# EAGLE board 16x16_3mm_3.2x3.2_shroud_header_charlieplexed_holes (EAGLE 6.0)
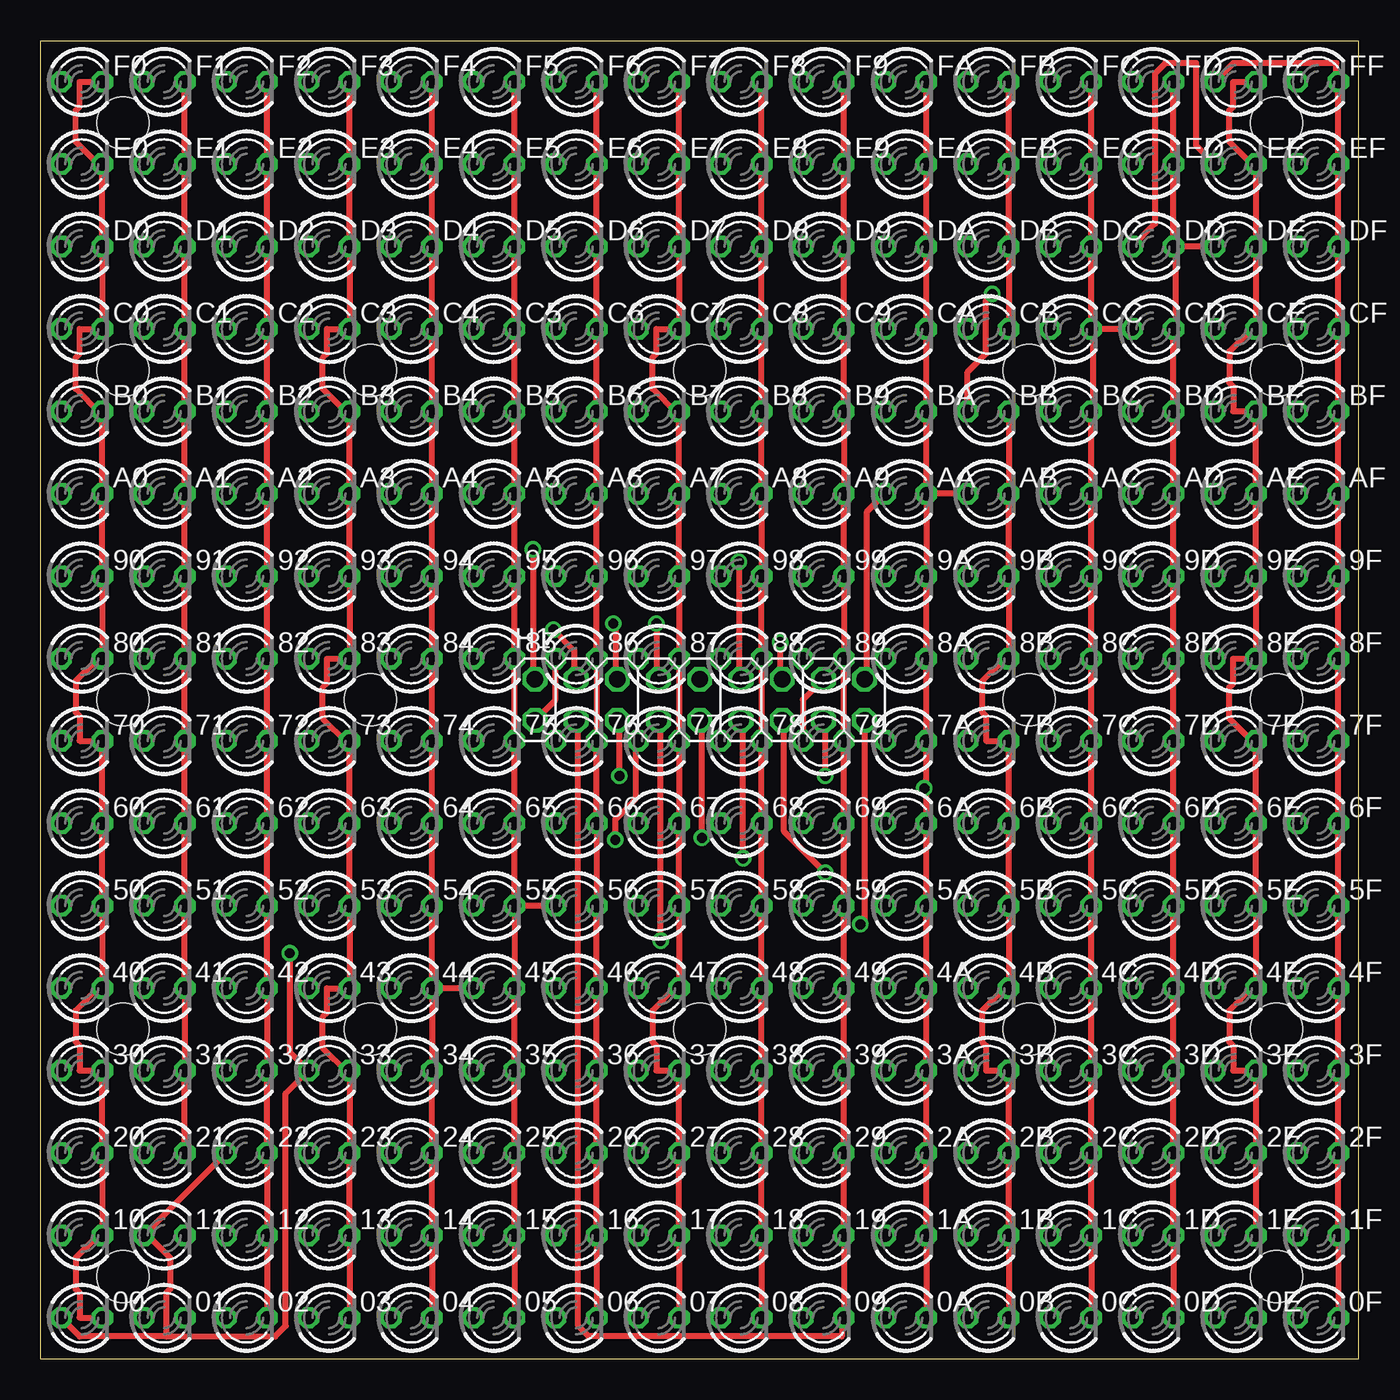
[diagram p0: board, top side]
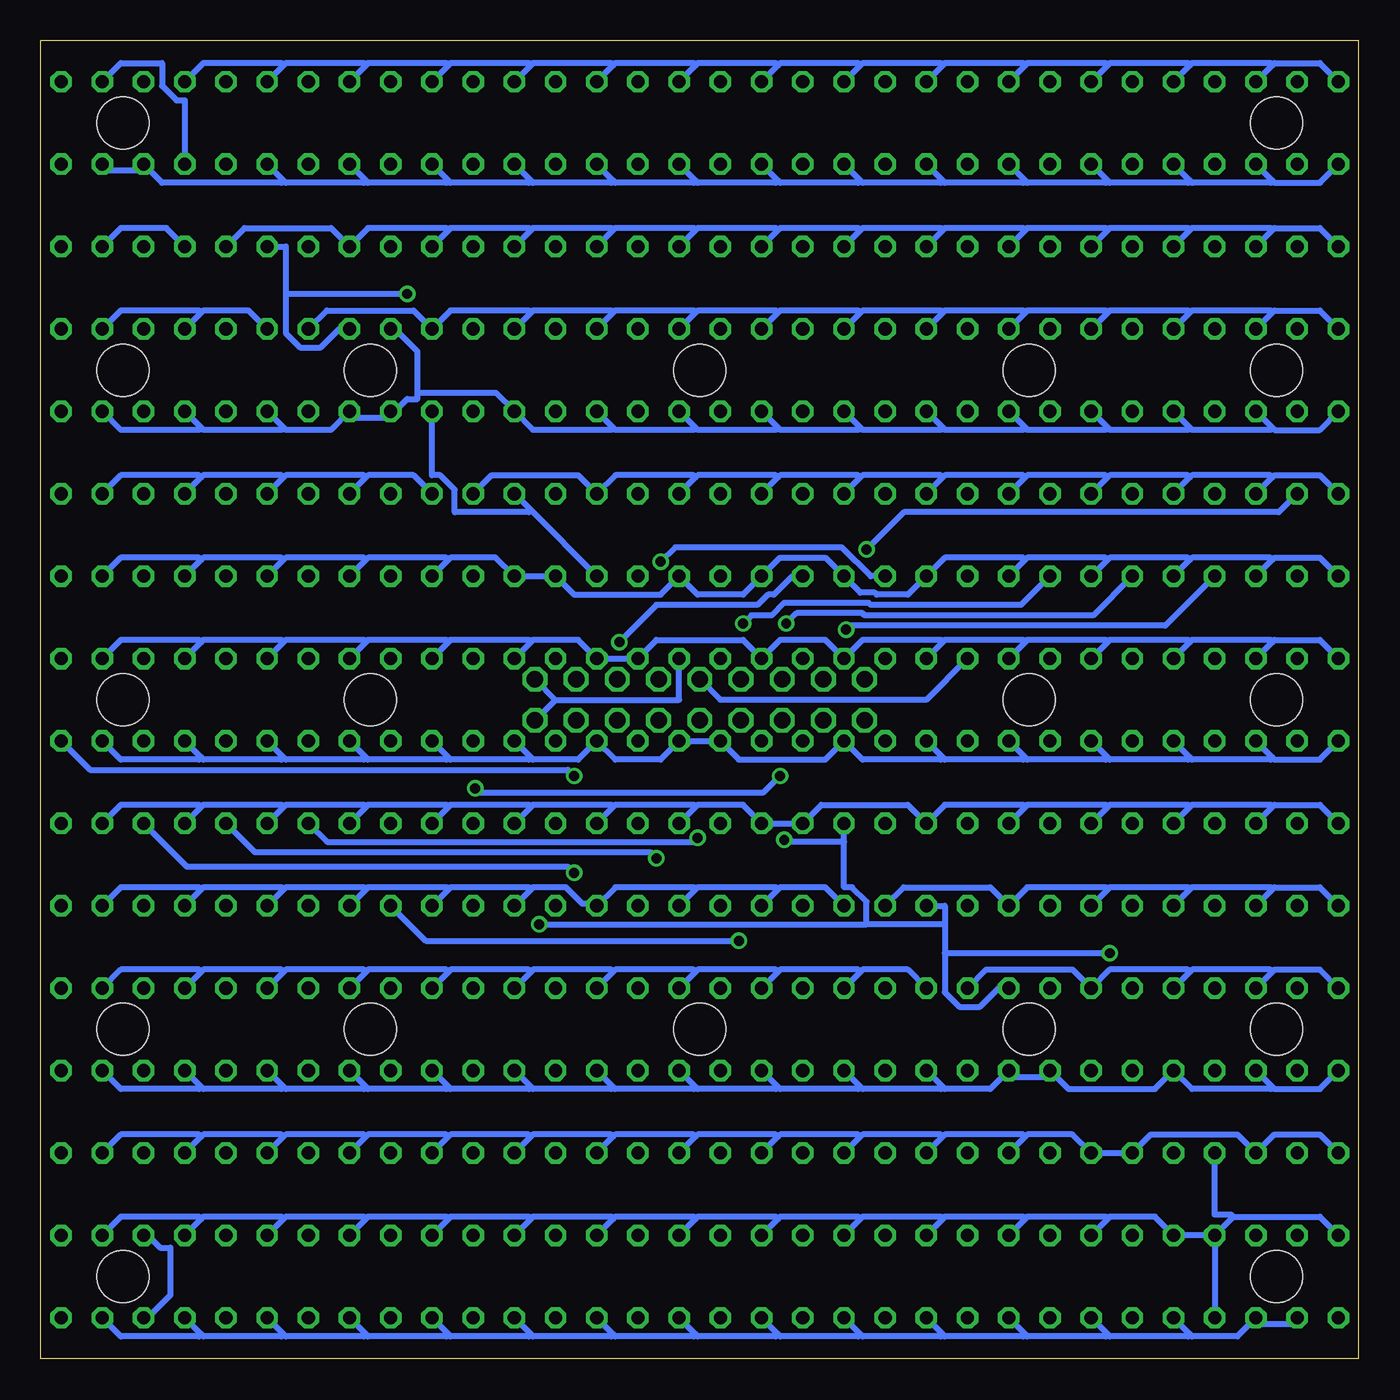
[diagram p1: board, bottom side, seen from below]

Size 81.28 x 81.28 mm. Coordinates in mm from the lower left corner, seen from the top.
Outline: 0,0 0,81.28 81.28,81.28 81.28,0 0,0
Copper layers (1*16): Top 0.035mm / dielectric 1.5mm / Bottom 0.035mm
Design rules: minimum track width 15mil, minimum drill 24mil, track to track 10mil, track to pad 10mil, pad to pad 8mil, via to via 8mil, smd to smd 8mil, copper to edge 40mil, drill to drill 8mil, minimum pad ring 10mil, minimum via ring 8mil, stop-mask expansion 4mil, vias tented up to drill 0mil, thermal gap 10mil
Holes 3.2 mm at 5.08,76.2 76.2,76.2 76.2,5.08 5.08,5.08 5.08,40.64 76.2,40.64 20.32,40.64 60.96,40.64 20.32,60.96 40.64,60.96 60.96,60.96 60.96,20.32 40.64,20.32 20.32,20.32 5.08,20.32 76.2,20.32 5.08,60.96 76.2,60.96

## Footprints (pad centres in the part's own frame; a part is rotated, then mirrored left to right if it is on the bottom)
LED3MM = drill 0.813 octagon: A -1.27,0; K 1.27,0
2X09 = drill 1.016 octagon: 1 -10.16,-1.27; 2 -10.16,1.27; 3 -7.62,-1.27; 4 -7.62,1.27; 5 -5.08,-1.27; 6 -5.08,1.27; 7 -2.54,-1.27; 8 -2.54,1.27; 9 0,-1.27; 10 0,1.27; 11 2.54,-1.27; 12 2.54,1.27; 13 5.08,-1.27; 14 5.08,1.27; 15 7.62,-1.27; 16 7.62,1.27; 17 10.16,-1.27; 18 10.16,1.27

## Placement (x,y rotation side)
00  [LED3MM]  2.54,2.54 0 top
0A  [LED3MM]  53.34,2.54 0 top
0B  [LED3MM]  58.42,2.54 0 top
0C  [LED3MM]  63.5,2.54 0 top
0D  [LED3MM]  68.58,2.54 0 top
0E  [LED3MM]  73.66,2.54 0 top
0F  [LED3MM]  78.74,2.54 0 top
01  [LED3MM]  7.62,2.54 0 top
1A  [LED3MM]  53.34,7.62 0 top
1B  [LED3MM]  58.42,7.62 0 top
1C  [LED3MM]  63.5,7.62 0 top
1D  [LED3MM]  68.58,7.62 0 top
1E  [LED3MM]  73.66,7.62 0 top
1F  [LED3MM]  78.74,7.62 0 top
02  [LED3MM]  12.7,2.54 0 top
2A  [LED3MM]  53.34,12.7 0 top
2B  [LED3MM]  58.42,12.7 0 top
2C  [LED3MM]  63.5,12.7 0 top
2D  [LED3MM]  68.58,12.7 0 top
2E  [LED3MM]  73.66,12.7 0 top
2F  [LED3MM]  78.74,12.7 0 top
03  [LED3MM]  17.78,2.54 0 top
3A  [LED3MM]  53.34,17.78 0 top
3B  [LED3MM]  58.42,17.78 0 top
3C  [LED3MM]  63.5,17.78 0 top
3D  [LED3MM]  68.58,17.78 0 top
3E  [LED3MM]  73.66,17.78 0 top
3F  [LED3MM]  78.74,17.78 0 top
04  [LED3MM]  22.86,2.54 0 top
4A  [LED3MM]  53.34,22.86 0 top
4B  [LED3MM]  58.42,22.86 0 top
4C  [LED3MM]  63.5,22.86 0 top
4D  [LED3MM]  68.58,22.86 0 top
4E  [LED3MM]  73.66,22.86 0 top
4F  [LED3MM]  78.74,22.86 0 top
05  [LED3MM]  27.94,2.54 0 top
5A  [LED3MM]  53.34,27.94 0 top
5B  [LED3MM]  58.42,27.94 0 top
5C  [LED3MM]  63.5,27.94 0 top
5D  [LED3MM]  68.58,27.94 0 top
5E  [LED3MM]  73.66,27.94 0 top
5F  [LED3MM]  78.74,27.94 0 top
06  [LED3MM]  33.02,2.54 0 top
6A  [LED3MM]  53.34,33.02 0 top
6B  [LED3MM]  58.42,33.02 0 top
6C  [LED3MM]  63.5,33.02 0 top
6D  [LED3MM]  68.58,33.02 0 top
6E  [LED3MM]  73.66,33.02 0 top
6F  [LED3MM]  78.74,33.02 0 top
07  [LED3MM]  38.1,2.54 0 top
7A  [LED3MM]  53.34,38.1 0 top
7B  [LED3MM]  58.42,38.1 0 top
7C  [LED3MM]  63.5,38.1 0 top
7D  [LED3MM]  68.58,38.1 0 top
7E  [LED3MM]  73.66,38.1 0 top
7F  [LED3MM]  78.74,38.1 0 top
08  [LED3MM]  43.18,2.54 0 top
8A  [LED3MM]  53.34,43.18 0 top
8B  [LED3MM]  58.42,43.18 0 top
8C  [LED3MM]  63.5,43.18 0 top
8D  [LED3MM]  68.58,43.18 0 top
8E  [LED3MM]  73.66,43.18 0 top
8F  [LED3MM]  78.74,43.18 0 top
09  [LED3MM]  48.26,2.54 0 top
9A  [LED3MM]  53.34,48.26 0 top
9B  [LED3MM]  58.42,48.26 0 top
9C  [LED3MM]  63.5,48.26 0 top
9D  [LED3MM]  68.58,48.26 0 top
9E  [LED3MM]  73.66,48.26 0 top
9F  [LED3MM]  78.74,48.26 0 top
10  [LED3MM]  2.54,7.62 0 top
11  [LED3MM]  7.62,7.62 0 top
12  [LED3MM]  12.7,7.62 0 top
13  [LED3MM]  17.78,7.62 0 top
14  [LED3MM]  22.86,7.62 0 top
15  [LED3MM]  27.94,7.62 0 top
16  [LED3MM]  33.02,7.62 0 top
17  [LED3MM]  38.1,7.62 0 top
18  [LED3MM]  43.18,7.62 0 top
19  [LED3MM]  48.26,7.62 0 top
20  [LED3MM]  2.54,12.7 0 top
21  [LED3MM]  7.62,12.7 0 top
22  [LED3MM]  12.7,12.7 0 top
23  [LED3MM]  17.78,12.7 0 top
24  [LED3MM]  22.86,12.7 0 top
25  [LED3MM]  27.94,12.7 0 top
26  [LED3MM]  33.02,12.7 0 top
27  [LED3MM]  38.1,12.7 0 top
28  [LED3MM]  43.18,12.7 0 top
29  [LED3MM]  48.26,12.7 0 top
30  [LED3MM]  2.54,17.78 0 top
31  [LED3MM]  7.62,17.78 0 top
32  [LED3MM]  12.7,17.78 0 top
33  [LED3MM]  17.78,17.78 0 top
34  [LED3MM]  22.86,17.78 0 top
35  [LED3MM]  27.94,17.78 0 top
36  [LED3MM]  33.02,17.78 0 top
37  [LED3MM]  38.1,17.78 0 top
38  [LED3MM]  43.18,17.78 0 top
39  [LED3MM]  48.26,17.78 0 top
40  [LED3MM]  2.54,22.86 0 top
41  [LED3MM]  7.62,22.86 0 top
42  [LED3MM]  12.7,22.86 0 top
43  [LED3MM]  17.78,22.86 0 top
44  [LED3MM]  22.86,22.86 0 top
45  [LED3MM]  27.94,22.86 0 top
46  [LED3MM]  33.02,22.86 0 top
47  [LED3MM]  38.1,22.86 0 top
48  [LED3MM]  43.18,22.86 0 top
49  [LED3MM]  48.26,22.86 0 top
50  [LED3MM]  2.54,27.94 0 top
51  [LED3MM]  7.62,27.94 0 top
52  [LED3MM]  12.7,27.94 0 top
53  [LED3MM]  17.78,27.94 0 top
54  [LED3MM]  22.86,27.94 0 top
55  [LED3MM]  27.94,27.94 0 top
56  [LED3MM]  33.02,27.94 0 top
57  [LED3MM]  38.1,27.94 0 top
58  [LED3MM]  43.18,27.94 0 top
59  [LED3MM]  48.26,27.94 0 top
60  [LED3MM]  2.54,33.02 0 top
61  [LED3MM]  7.62,33.02 0 top
62  [LED3MM]  12.7,33.02 0 top
63  [LED3MM]  17.78,33.02 0 top
64  [LED3MM]  22.86,33.02 0 top
65  [LED3MM]  27.94,33.02 0 top
66  [LED3MM]  33.02,33.02 0 top
67  [LED3MM]  38.1,33.02 0 top
68  [LED3MM]  43.18,33.02 0 top
69  [LED3MM]  48.26,33.02 0 top
70  [LED3MM]  2.54,38.1 0 top
71  [LED3MM]  7.62,38.1 0 top
72  [LED3MM]  12.7,38.1 0 top
73  [LED3MM]  17.78,38.1 0 top
74  [LED3MM]  22.86,38.1 0 top
75  [LED3MM]  27.94,38.1 0 top
76  [LED3MM]  33.02,38.1 0 top
77  [LED3MM]  38.1,38.1 0 top
78  [LED3MM]  43.18,38.1 0 top
79  [LED3MM]  48.26,38.1 0 top
80  [LED3MM]  2.54,43.18 0 top
81  [LED3MM]  7.62,43.18 0 top
82  [LED3MM]  12.7,43.18 0 top
83  [LED3MM]  17.78,43.18 0 top
84  [LED3MM]  22.86,43.18 0 top
85  [LED3MM]  27.94,43.18 0 top
86  [LED3MM]  33.02,43.18 0 top
87  [LED3MM]  38.1,43.18 0 top
88  [LED3MM]  43.18,43.18 0 top
89  [LED3MM]  48.26,43.18 0 top
90  [LED3MM]  2.54,48.26 0 top
91  [LED3MM]  7.62,48.26 0 top
92  [LED3MM]  12.7,48.26 0 top
93  [LED3MM]  17.78,48.26 0 top
94  [LED3MM]  22.86,48.26 0 top
95  [LED3MM]  27.94,48.26 0 top
96  [LED3MM]  33.02,48.26 0 top
97  [LED3MM]  38.1,48.26 0 top
98  [LED3MM]  43.18,48.26 0 top
99  [LED3MM]  48.26,48.26 0 top
A0  [LED3MM]  2.54,53.34 0 top
A1  [LED3MM]  7.62,53.34 0 top
A2  [LED3MM]  12.7,53.34 0 top
A3  [LED3MM]  17.78,53.34 0 top
A4  [LED3MM]  22.86,53.34 0 top
A5  [LED3MM]  27.94,53.34 0 top
A6  [LED3MM]  33.02,53.34 0 top
A7  [LED3MM]  38.1,53.34 0 top
A8  [LED3MM]  43.18,53.34 0 top
A9  [LED3MM]  48.26,53.34 0 top
AA  [LED3MM]  53.34,53.34 0 top
AB  [LED3MM]  58.42,53.34 0 top
AC  [LED3MM]  63.5,53.34 0 top
AD  [LED3MM]  68.58,53.34 0 top
AE  [LED3MM]  73.66,53.34 0 top
AF  [LED3MM]  78.74,53.34 0 top
B0  [LED3MM]  2.54,58.42 0 top
B1  [LED3MM]  7.62,58.42 0 top
B2  [LED3MM]  12.7,58.42 0 top
B3  [LED3MM]  17.78,58.42 0 top
B4  [LED3MM]  22.86,58.42 0 top
B5  [LED3MM]  27.94,58.42 0 top
B6  [LED3MM]  33.02,58.42 0 top
B7  [LED3MM]  38.1,58.42 0 top
B8  [LED3MM]  43.18,58.42 0 top
B9  [LED3MM]  48.26,58.42 0 top
BA  [LED3MM]  53.34,58.42 0 top
BB  [LED3MM]  58.42,58.42 0 top
BC  [LED3MM]  63.5,58.42 0 top
BD  [LED3MM]  68.58,58.42 0 top
BE  [LED3MM]  73.66,58.42 0 top
BF  [LED3MM]  78.74,58.42 0 top
C0  [LED3MM]  2.54,63.5 0 top
C1  [LED3MM]  7.62,63.5 0 top
C2  [LED3MM]  12.7,63.5 0 top
C3  [LED3MM]  17.78,63.5 0 top
C4  [LED3MM]  22.86,63.5 0 top
C5  [LED3MM]  27.94,63.5 0 top
C6  [LED3MM]  33.02,63.5 0 top
C7  [LED3MM]  38.1,63.5 0 top
C8  [LED3MM]  43.18,63.5 0 top
C9  [LED3MM]  48.26,63.5 0 top
CA  [LED3MM]  53.34,63.5 0 top
CB  [LED3MM]  58.42,63.5 0 top
CC  [LED3MM]  63.5,63.5 0 top
CD  [LED3MM]  68.58,63.5 0 top
CE  [LED3MM]  73.66,63.5 0 top
CF  [LED3MM]  78.74,63.5 0 top
D0  [LED3MM]  2.54,68.58 0 top
D1  [LED3MM]  7.62,68.58 0 top
D2  [LED3MM]  12.7,68.58 0 top
D3  [LED3MM]  17.78,68.58 0 top
D4  [LED3MM]  22.86,68.58 0 top
D5  [LED3MM]  27.94,68.58 0 top
D6  [LED3MM]  33.02,68.58 0 top
D7  [LED3MM]  38.1,68.58 0 top
D8  [LED3MM]  43.18,68.58 0 top
D9  [LED3MM]  48.26,68.58 0 top
DA  [LED3MM]  53.34,68.58 0 top
DB  [LED3MM]  58.42,68.58 0 top
DC  [LED3MM]  63.5,68.58 0 top
DD  [LED3MM]  68.58,68.58 0 top
DE  [LED3MM]  73.66,68.58 0 top
DF  [LED3MM]  78.74,68.58 0 top
E0  [LED3MM]  2.54,73.66 0 top
E1  [LED3MM]  7.62,73.66 0 top
E2  [LED3MM]  12.7,73.66 0 top
E3  [LED3MM]  17.78,73.66 0 top
E4  [LED3MM]  22.86,73.66 0 top
E5  [LED3MM]  27.94,73.66 0 top
E6  [LED3MM]  33.02,73.66 0 top
E7  [LED3MM]  38.1,73.66 0 top
E8  [LED3MM]  43.18,73.66 0 top
E9  [LED3MM]  48.26,73.66 0 top
EA  [LED3MM]  53.34,73.66 0 top
EB  [LED3MM]  58.42,73.66 0 top
EC  [LED3MM]  63.5,73.66 0 top
ED  [LED3MM]  68.58,73.66 0 top
EE  [LED3MM]  73.66,73.66 0 top
EF  [LED3MM]  78.74,73.66 0 top
F0  [LED3MM]  2.54,78.74 0 top
F1  [LED3MM]  7.62,78.74 0 top
F2  [LED3MM]  12.7,78.74 0 top
F3  [LED3MM]  17.78,78.74 0 top
F4  [LED3MM]  22.86,78.74 0 top
F5  [LED3MM]  27.94,78.74 0 top
F6  [LED3MM]  33.02,78.74 0 top
F7  [LED3MM]  38.1,78.74 0 top
F8  [LED3MM]  43.18,78.74 0 top
F9  [LED3MM]  48.26,78.74 0 top
FA  [LED3MM]  53.34,78.74 0 top
FB  [LED3MM]  58.42,78.74 0 top
FC  [LED3MM]  63.5,78.74 0 top
FD  [LED3MM]  68.58,78.74 0 top
FE  [LED3MM]  73.66,78.74 0 top
FF  [LED3MM]  78.74,78.74 0 top
H1  [2X09]  40.64,40.64 0 top

## Library data of the parts
00 0A 0B 0C 0D 0E 0F 01 1A 1B 1C 1D 1E 1F 02 2A 2B 2C 2D 2E 2F 03 3A 3B 3C 3D 3E 3F 04 4A 4B 4C 4D 4E 4F 05 5A 5B 5C 5D 5E 5F 06 6A 6B 6C 6D 6E 6F 07 7A 7B 7C 7D 7E 7F 08 8A 8B 8C 8D 8E 8F 09 9A 9B 9C 9D 9E 9F 10-99 A0 A1-A9 AA AB AC AD AE AF B0 B1-B9 BA BB BC BD BE BF C0 C1-C9 CA CB CC CD CE CF D0 D1-D9 DA DB DC DD DE DF E0 E1-E9 EA EB EC ED EE EF F0 F1-F9 FA FB FC FD FE FF = led
H1 = pinhead

## Nets
D: 00.A 11.A 22.A 33.A 44.A 55.A 66.A 77.A 88.A 99.A AA.A BB.A CC.A DD.A EE.A FF.A H1.17 H1.18
S0: 00.K 0A.A 0B.A 0C.A 0D.A 0E.A 0F.A 01.A 02.A 03.A 04.A 05.A 06.A 07.A 08.A 09.A 10.K 20.K 30.K 40.K 50.K 60.K 70.K 80.K 90.K A0.K B0.K C0.K D0.K E0.K F0.K H1.2
S1: 01.K 1A.A 1B.A 1C.A 1D.A 1E.A 1F.A 10.A 11.K 12.A 13.A 14.A 15.A 16.A 17.A 18.A 19.A 21.K 31.K 41.K 51.K 61.K 71.K 81.K 91.K A1.K B1.K C1.K D1.K E1.K F1.K H1.4
S2: 02.K 2A.A 2B.A 2C.A 2D.A 2E.A 2F.A 12.K 20.A 21.A 22.K 23.A 24.A 25.A 26.A 27.A 28.A 29.A 32.K 42.K 52.K 62.K 72.K 82.K 92.K A2.K B2.K C2.K D2.K E2.K F2.K H1.6
S3: 03.K 3A.A 3B.A 3C.A 3D.A 3E.A 3F.A 13.K 23.K 30.A 31.A 32.A 33.K 34.A 35.A 36.A 37.A 38.A 39.A 43.K 53.K 63.K 73.K 83.K 93.K A3.K B3.K C3.K D3.K E3.K F3.K H1.8
S4: 04.K 4A.A 4B.A 4C.A 4D.A 4E.A 4F.A 14.K 24.K 34.K 40.A 41.A 42.A 43.A 44.K 45.A 46.A 47.A 48.A 49.A 54.K 64.K 74.K 84.K 94.K A4.K B4.K C4.K D4.K E4.K F4.K H1.10
S5: 05.K 5A.A 5B.A 5C.A 5D.A 5E.A 5F.A 15.K 25.K 35.K 45.K 50.A 51.A 52.A 53.A 54.A 55.K 56.A 57.A 58.A 59.A 65.K 75.K 85.K 95.K A5.K B5.K C5.K D5.K E5.K F5.K H1.12
S6: 06.K 6A.A 6B.A 6C.A 6D.A 6E.A 6F.A 16.K 26.K 36.K 46.K 56.K 60.A 61.A 62.A 63.A 64.A 65.A 66.K 67.A 68.A 69.A 76.K 86.K 96.K A6.K B6.K C6.K D6.K E6.K F6.K H1.14
S7: 07.K 7A.A 7B.A 7C.A 7D.A 7E.A 7F.A 17.K 27.K 37.K 47.K 57.K 67.K 70.A 71.A 72.A 73.A 74.A 75.A 76.A 77.K 78.A 79.A 87.K 97.K A7.K B7.K C7.K D7.K E7.K F7.K H1.16
S8: 08.K 8A.A 8B.A 8C.A 8D.A 8E.A 8F.A 18.K 28.K 38.K 48.K 58.K 68.K 78.K 80.A 81.A 82.A 83.A 84.A 85.A 86.A 87.A 88.K 89.A 98.K A8.K B8.K C8.K D8.K E8.K F8.K H1.1
S9: 09.K 9A.A 9B.A 9C.A 9D.A 9E.A 9F.A 19.K 29.K 39.K 49.K 59.K 69.K 79.K 89.K 90.A 91.A 92.A 93.A 94.A 95.A 96.A 97.A 98.A 99.K A9.K B9.K C9.K D9.K E9.K F9.K H1.3
S10: 0A.K 1A.K 2A.K 3A.K 4A.K 5A.K 6A.K 7A.K 8A.K 9A.K A0.A A1.A A2.A A3.A A4.A A5.A A6.A A7.A A8.A A9.A AA.K AB.A AC.A AD.A AE.A AF.A BA.K CA.K DA.K EA.K FA.K H1.5
S11: 0B.K 1B.K 2B.K 3B.K 4B.K 5B.K 6B.K 7B.K 8B.K 9B.K AB.K B0.A B1.A B2.A B3.A B4.A B5.A B6.A B7.A B8.A B9.A BA.A BB.K BC.A BD.A BE.A BF.A CB.K DB.K EB.K FB.K H1.7
S12: 0C.K 1C.K 2C.K 3C.K 4C.K 5C.K 6C.K 7C.K 8C.K 9C.K AC.K BC.K C0.A C1.A C2.A C3.A C4.A C5.A C6.A C7.A C8.A C9.A CA.A CB.A CC.K CD.A CE.A CF.A DC.K EC.K FC.K H1.9
S13: 0D.K 1D.K 2D.K 3D.K 4D.K 5D.K 6D.K 7D.K 8D.K 9D.K AD.K BD.K CD.K D0.A D1.A D2.A D3.A D4.A D5.A D6.A D7.A D8.A D9.A DA.A DB.A DC.A DD.K DE.A DF.A ED.K FD.K H1.11
S14: 0E.K 1E.K 2E.K 3E.K 4E.K 5E.K 6E.K 7E.K 8E.K 9E.K AE.K BE.K CE.K DE.K E0.A E1.A E2.A E3.A E4.A E5.A E6.A E7.A E8.A E9.A EA.A EB.A EC.A ED.A EE.K EF.A FE.K H1.13
S15: 0F.K 1F.K 2F.K 3F.K 4F.K 5F.K 6F.K 7F.K 8F.K 9F.K AF.K BF.K CF.K DF.K EF.K F0.A F1.A F2.A F3.A F4.A F5.A F6.A F7.A F8.A F9.A FA.A FB.A FC.A FD.A FE.A FF.K H1.15

## Tracks (layer width: path | path; a pad name or v marks a point on that pad's centre or on a via)
D  (via drill 0.61)
  Top 0.381: 00.A 2.41,1.4 7.75,1.4 | 7.75,1.4 7.75,4.06 8,4.32 8,6.22 6.6,7.62 11.A 6.73,7.75 6.73,8 22.A | 7.75,1.4 14.48,1.4 15.11,2.03 15.11,16.38 33.A 15.37,18.92 v15.37,25.02 | 77.A 36.7,37.97 36.7,34.54 35.43,33.27 v35.43,32 | DD.A 68.71,69.98 68.71,79.25 69.34,79.88 71.25,79.88 71.25,74.8 EE.A | H1.18 50.93,42.04 50.93,52.2 AA.A | v58.67,65.66 58.29,65.28 58.29,61.98 57.15,60.83 BB.A | v50.55,26.8 50.8,27.05 H1.17
  Bottom 0.381: 44.A 22.23,22.86 23.37,21.72 24.64,21.72 25.53,22.61 25.53,25.02 | 25.53,26.8 25.53,27.94 55.A | 25.53,26.8 25.53,25.02 | 31.75,31.88 31.75,29.08 31.24,29.08 30.35,28.19 30.35,26.8 | 31.75,31.88 66.A | 25.53,26.8 30.35,26.8 | v35.43,32 35.31,31.88 31.75,31.88 | 25.53,25.02 v15.37,25.02 | CC.A 62.87,63.5 64.01,62.36 65.28,62.36 66.17,63.25 66.17,65.66 | 66.17,65.66 66.17,68.58 DD.A | EE.A 72.39,77.6 72.9,77.6 73.79,78.49 73.79,79.88 76.33,79.88 FF.A | 88.A 41.91,40.64 49.53,40.64 | H1.18 49.53,40.64 | 49.53,40.64 H1.17 | AA.A 51.05,52.32 | 51.05,52.32 99.A | BB.A 57.15,54.48 56.64,54.48 55.75,53.59 55.75,52.2 51.18,52.2 51.05,52.32 | v58.67,65.66 66.17,65.66 | v50.55,26.8 30.35,26.8
S0  (via drill 0.61)
  Top 0.381: F0.K 2.41,78.74 2.41,77.22 2.16,76.96 2.16,75.06 3.68,73.53 E0.K D0.K C0.K 2.41,63.5 2.41,61.98 2.16,61.72 2.16,59.82 3.68,58.29 B0.K A0.K 90.K 80.K 3.68,43.31 2.16,41.78 2.16,39.88 2.41,39.62 2.41,38.1 70.K 60.K 50.K 40.K 3.68,22.99 2.16,21.46 2.16,19.56 2.41,19.3 2.41,17.78 30.K 20.K 10.K 3.68,7.75 2.16,6.22 2.16,4.32 2.41,4.06 2.41,2.54 00.K | H1.2 30.35,42.04 v30.35,49.91
  Bottom 0.381: 00.K 4.19,2.16 5.97,2.16 01.A 7.49,1.4 10.29,1.4 10.41,1.52 | 10.41,1.52 02.A | 15.49,1.52 15.37,1.4 10.54,1.4 10.41,1.52 | 15.49,1.52 03.A | 20.57,1.52 20.45,1.4 15.62,1.4 15.49,1.52 | 20.57,1.52 04.A | 25.65,1.52 25.53,1.4 20.7,1.4 20.57,1.52 | 25.65,1.52 05.A | 30.73,1.52 30.61,1.4 25.78,1.4 25.65,1.52 | 30.73,1.52 06.A | 35.81,1.52 35.69,1.4 30.86,1.4 30.73,1.52 | 35.81,1.52 07.A | 40.89,1.52 40.77,1.4 35.94,1.4 35.81,1.52 | 40.89,1.52 08.A | 45.97,1.52 45.85,1.4 41.02,1.4 40.89,1.52 | 45.97,1.52 09.A | 51.05,1.52 50.93,1.4 46.1,1.4 45.97,1.52 | 51.05,1.52 0A.A | 56.13,1.52 56.01,1.4 51.18,1.4 51.05,1.52 | 56.13,1.52 0B.A | 61.21,1.52 61.09,1.4 56.26,1.4 56.13,1.52 | 61.21,1.52 0C.A | 66.29,1.52 66.17,1.4 61.34,1.4 61.21,1.52 | 66.29,1.52 0D.A | 71.37,1.52 71.25,1.4 66.42,1.4 66.29,1.52 | 71.37,1.52 0E.A | 0F.A 76.33,1.4 71.5,1.4 71.37,1.52 | v30.35,49.91 28.07,52.2 4.95,52.2 A0.K
S1  (via drill 0.61)
  Top 0.381: F1.K E1.K D1.K C1.K B1.K A1.K 91.K 81.K 71.K 61.K 51.K 41.K 31.K 21.K | H1.4 32.89,42.04 32.89,43.69 v31.62,44.96
  Bottom 0.381: v31.62,44.96 31.37,45.21 11.94,45.21 91.K | 10.A 2.41,8.76 7.75,8.76 | 11.K 7.75,8.76 | 11.K 01.K | 11.K 12.A 12.57,8.76 15.37,8.76 15.49,8.64 | 15.49,8.64 13.A | 20.57,8.64 20.45,8.76 15.62,8.76 15.49,8.64 | 20.57,8.64 14.A | 25.65,8.64 25.53,8.76 20.7,8.76 20.57,8.64 | 25.65,8.64 15.A | 30.73,8.64 30.61,8.76 25.78,8.76 25.65,8.64 | 30.73,8.64 16.A | 35.81,8.64 35.69,8.76 30.86,8.76 30.73,8.64 | 35.81,8.64 17.A | 40.89,8.64 40.77,8.76 35.94,8.76 35.81,8.64 | 40.89,8.64 18.A | 45.97,8.64 45.85,8.76 41.02,8.76 40.89,8.64 | 45.97,8.64 19.A | 51.05,8.64 50.93,8.76 46.1,8.76 45.97,8.64 | 51.05,8.64 1A.A | 56.13,8.64 56.01,8.76 51.18,8.76 51.05,8.64 | 56.13,8.64 1B.A | 61.21,8.64 61.09,8.76 56.26,8.76 56.13,8.64 | 61.21,8.64 1C.A | 66.29,8.64 66.17,8.76 61.34,8.76 61.21,8.64 | 66.29,8.64 1D.A | 71.37,8.64 71.25,8.76 66.42,8.76 66.29,8.64 | 71.37,8.64 1E.A | 1F.A 76.33,8.76 71.5,8.76 71.37,8.64 | 21.K 8.89,8.89 7.87,8.89 7.75,8.76
S2  (via drill 0.61)
  Top 0.381: F2.K E2.K D2.K C2.K B2.K A2.K 92.K 82.K 72.K 62.K 52.K 42.K 32.K 22.K 12.K 02.K | H1.6 35.43,42.04 35.43,45.21 v35.31,45.34
  Bottom 0.381: v35.31,45.34 34.67,45.97 30.61,45.97 30.48,45.85 16.38,45.85 92.K | 20.A 2.41,13.84 5.21,13.84 21.A 7.49,13.84 12.83,13.84 22.K 23.A 17.65,13.84 20.45,13.84 20.57,13.72 | 20.57,13.72 24.A | 25.65,13.72 25.53,13.84 20.7,13.84 20.57,13.72 | 25.65,13.72 25.A | 30.73,13.72 30.61,13.84 25.78,13.84 25.65,13.72 | 30.73,13.72 26.A | 35.81,13.72 35.69,13.84 30.86,13.84 30.73,13.72 | 35.81,13.72 27.A | 40.89,13.72 40.77,13.84 35.94,13.84 35.81,13.72 | 40.89,13.72 28.A | 45.97,13.72 45.85,13.84 41.02,13.84 40.89,13.72 | 45.97,13.72 29.A | 51.05,13.72 50.93,13.84 46.1,13.84 45.97,13.72 | 51.05,13.72 2A.A | 56.13,13.72 56.01,13.84 51.18,13.84 51.05,13.72 | 56.13,13.72 2B.A | 61.21,13.72 61.09,13.84 56.26,13.84 56.13,13.72 | 61.21,13.72 2C.A | 66.29,13.72 66.17,13.84 61.34,13.84 61.21,13.72 | 66.29,13.72 2D.A | 71.37,13.72 71.25,13.84 66.42,13.84 66.29,13.72 | 71.37,13.72 2E.A | 2F.A 76.33,13.84 71.5,13.84 71.37,13.72
S3  (via drill 0.61)
  Top 0.381: F3.K E3.K D3.K C3.K 17.65,63.5 17.65,61.98 17.4,61.72 17.4,59.82 18.92,58.29 B3.K A3.K 93.K 83.K 17.65,43.18 17.65,41.66 17.4,41.4 17.4,39.5 18.92,37.97 73.K 63.K 53.K 43.K 17.65,22.86 17.65,21.34 17.4,21.08 17.4,19.18 18.92,17.65 33.K 23.K 13.K 03.K | H1.8 37.97,42.04 v37.97,45.34
  Bottom 0.381: v37.97,45.34 37.47,45.85 36.2,45.85 35.43,46.61 30.23,46.61 30.1,46.48 20.83,46.48 93.K | 30.A 2.41,16.64 5.21,16.64 5.33,16.76 | 31.A 5.33,16.76 | 5.33,16.76 5.46,16.64 10.29,16.64 32.A 12.57,16.64 17.91,16.64 33.K 19.43,17.4 21.21,17.4 34.A 22.73,16.64 25.53,16.64 25.65,16.76 | 25.65,16.76 35.A | 30.73,16.76 30.61,16.64 25.78,16.64 25.65,16.76 | 30.73,16.76 36.A | 35.81,16.76 35.69,16.64 30.86,16.64 30.73,16.76 | 35.81,16.76 37.A | 40.89,16.76 40.77,16.64 35.94,16.64 35.81,16.76 | 40.89,16.76 38.A | 45.97,16.76 45.85,16.64 41.02,16.64 40.89,16.76 | 45.97,16.76 39.A | 51.05,16.76 50.93,16.64 46.1,16.64 45.97,16.76 | 51.05,16.76 3A.A | 56.13,16.76 56.01,16.64 51.18,16.64 51.05,16.76 | 56.13,16.76 3B.A | 61.21,16.76 61.09,16.64 56.26,16.64 56.13,16.76 | 61.21,16.76 3C.A | 66.29,16.76 66.17,16.64 61.34,16.64 61.21,16.76 | 66.29,16.76 3D.A | 71.37,16.76 71.25,16.64 66.42,16.64 66.29,16.76 | 71.37,16.76 3E.A | 3F.A 76.33,16.64 71.5,16.64 71.37,16.76
S4
  Top 0.381: 04.K 14.K 24.K 34.K 44.K | 45.A 44.K | 44.K 54.K 64.K 74.K 84.K 94.K A4.K B4.K C4.K D4.K E4.K F4.K
  Bottom 0.381: 40.A 2.41,24 5.21,24 5.33,23.88 | 41.A 5.33,23.88 | 10.41,23.88 10.29,24 5.46,24 5.33,23.88 | 10.41,23.88 42.A | 10.41,23.88 10.54,24 15.37,24 43.A 17.65,24 22.99,24 44.K | 30.73,23.88 30.61,24 27.81,24 45.A | 30.73,23.88 46.A | 35.81,23.88 35.69,24 30.86,24 30.73,23.88 | 35.81,23.88 47.A | 40.89,23.88 40.77,24 35.94,24 35.81,23.88 | 40.89,23.88 48.A | 45.97,23.88 45.85,24 41.02,24 40.89,23.88 | 45.97,23.88 49.A | 51.05,23.88 50.93,24 46.1,24 45.97,23.88 | 51.05,23.88 4A.A | 56.13,23.88 56.01,24 51.18,24 51.05,23.88 | 56.13,23.88 4B.A | 61.21,23.88 61.09,24 56.26,24 56.13,23.88 | 61.21,23.88 4C.A | 66.29,23.88 66.17,24 61.34,24 61.21,23.88 | 66.29,23.88 4D.A | 71.37,23.88 71.25,24 66.42,24 66.29,23.88 | 71.37,23.88 4E.A | 4F.A 76.33,24 71.5,24 71.37,23.88 | H1.10 39.37,40.64 26.67,40.64 84.K
S5  (via drill 0.61)
  Top 0.381: 05.K 15.K 25.K 35.K 45.K 55.K | 56.A 55.K | 55.K 65.K 75.K 85.K 95.K A5.K B5.K C5.K D5.K E5.K F5.K | H1.12 43.05,42.04 v43.05,49.15
  Bottom 0.381: 50.A 2.41,29.08 5.21,29.08 5.33,28.96 | 51.A 5.33,28.96 | 10.41,28.96 10.29,29.08 5.46,29.08 5.33,28.96 | 10.41,28.96 52.A | 15.49,28.96 15.37,29.08 10.54,29.08 10.41,28.96 | 15.49,28.96 53.A | 15.49,28.96 15.62,29.08 20.45,29.08 54.A 22.73,29.08 28.07,29.08 55.K | 35.81,28.96 35.69,29.08 32.89,29.08 56.A | 35.81,28.96 57.A | 40.89,28.96 40.77,29.08 35.94,29.08 35.81,28.96 | 40.89,28.96 58.A | 40.89,28.96 41.02,29.08 45.85,29.08 59.A 47.12,28.07 47.88,28.07 48.9,29.08 50.93,29.08 51.05,28.96 | 51.05,28.96 5A.A | 56.13,28.96 56.01,29.08 51.18,29.08 51.05,28.96 | 56.13,28.96 5B.A | 61.21,28.96 61.09,29.08 56.26,29.08 56.13,28.96 | 61.21,28.96 5C.A | 66.29,28.96 66.17,29.08 61.34,29.08 61.21,28.96 | 66.29,28.96 5D.A | 71.37,28.96 71.25,29.08 66.42,29.08 66.29,28.96 | 71.37,28.96 5E.A | 5F.A 76.33,29.08 71.5,29.08 71.37,28.96 | v43.05,49.15 42.16,50.04 31.88,50.04 30.1,48.26 95.K
S6  (via drill 0.61)
  Top 0.381: F6.K E6.K D6.K C6.K B6.K A6.K 96.K 86.K 76.K 66.K 56.K 46.K 36.K 26.K 16.K 06.K | H1.14 45.59,42.04 v45.59,44.2
  Bottom 0.381: v45.59,44.2 43.31,46.48 37.08,46.48 36.45,47.12 36.07,47.12 34.92,48.26 96.K | 60.A 2.41,34.16 5.21,34.16 5.33,34.04 | 61.A 5.33,34.04 | 10.41,34.04 10.29,34.16 5.46,34.16 5.33,34.04 | 10.41,34.04 62.A | 15.49,34.04 15.37,34.16 10.54,34.16 10.41,34.04 | 15.49,34.04 63.A | 20.57,34.04 20.45,34.16 15.62,34.16 15.49,34.04 | 20.57,34.04 64.A | 20.57,34.04 20.7,34.16 25.53,34.16 65.A 27.81,34.16 33.15,34.16 66.K 67.A 37.97,34.16 40.77,34.16 40.89,34.04 | 40.89,34.04 68.A | 45.97,34.04 45.85,34.16 41.02,34.16 40.89,34.04 | 45.97,34.04 69.A | 51.05,34.04 50.93,34.16 46.1,34.16 45.97,34.04 | 51.05,34.04 6A.A | 56.13,34.04 56.01,34.16 51.18,34.16 51.05,34.04 | 56.13,34.04 6B.A | 61.21,34.04 61.09,34.16 56.26,34.16 56.13,34.04 | 61.21,34.04 6C.A | 66.29,34.04 66.17,34.16 61.34,34.16 61.21,34.04 | 66.29,34.04 6D.A | 71.37,34.04 71.25,34.16 66.42,34.16 66.29,34.04 | 71.37,34.04 6E.A | 6F.A 76.33,34.16 71.5,34.16 71.37,34.04
S7
  Top 0.381: 79.A 46.99,40.64 H1.16 | F7.K E7.K D7.K C7.K 37.97,63.5 37.97,61.98 37.72,61.72 37.72,59.82 39.24,58.29 B7.K A7.K 97.K 87.K 77.K 67.K 57.K 47.K 39.24,22.99 37.72,21.46 37.72,19.56 37.97,19.3 37.97,17.78 37.K 27.K 17.K 07.K
  Bottom 0.381: 51.05,37.08 50.93,36.96 48.13,36.96 79.A 45.85,36.96 43.05,36.96 78.A 77.K 38.23,36.96 32.89,36.96 76.A 30.61,36.96 25.78,36.96 25.65,37.08 | 51.05,37.08 7A.A | 56.13,37.08 56.01,36.96 51.18,36.96 51.05,37.08 | 56.13,37.08 7B.A | 61.21,37.08 61.09,36.96 56.26,36.96 56.13,37.08 | 61.21,37.08 7C.A | 66.29,37.08 66.17,36.96 61.34,36.96 61.21,37.08 | 66.29,37.08 7D.A | 71.37,37.08 71.25,36.96 66.42,36.96 66.29,37.08 | 71.37,37.08 7E.A | 7F.A 76.33,36.96 71.5,36.96 71.37,37.08 | 70.A 2.41,36.96 5.21,36.96 5.33,37.08 | 71.A 5.33,37.08 | 10.41,37.08 10.29,36.96 5.46,36.96 5.33,37.08 | 10.41,37.08 72.A | 15.49,37.08 15.37,36.96 10.54,36.96 10.41,37.08 | 15.49,37.08 73.A | 20.57,37.08 20.45,36.96 15.62,36.96 15.49,37.08 | 20.57,37.08 74.A | 25.65,37.08 25.53,36.96 20.7,36.96 20.57,37.08 | 25.65,37.08 75.A
S8
  Top 0.381: 86.A 31.75,40.64 H1.1 | 08.K 18.K 28.K 38.K 48.K 58.K 68.K 78.K 88.K 98.K A8.K B8.K C8.K D8.K E8.K F8.K
  Bottom 0.381: 80.A 2.41,44.32 5.21,44.32 5.33,44.2 | 81.A 5.33,44.2 | 10.41,44.2 10.29,44.32 5.46,44.32 5.33,44.2 | 10.41,44.2 82.A | 15.49,44.2 15.37,44.32 10.54,44.32 10.41,44.2 | 15.49,44.2 83.A | 20.57,44.2 20.45,44.32 15.62,44.32 15.49,44.2 | 20.57,44.2 84.A | 25.65,44.2 25.53,44.32 20.7,44.32 20.57,44.2 | 25.65,44.2 85.A | 25.65,44.2 25.78,44.32 30.61,44.32 86.A 32.89,44.32 35.69,44.32 87.A 37.97,44.32 43.31,44.32 88.K 89.A 48.13,44.32 50.93,44.32 51.05,44.2 | 51.05,44.2 8A.A | 56.13,44.2 56.01,44.32 51.18,44.32 51.05,44.2 | 56.13,44.2 8B.A | 61.21,44.2 61.09,44.32 56.26,44.32 56.13,44.2 | 61.21,44.2 8C.A | 66.29,44.2 66.17,44.32 61.34,44.32 61.21,44.2 | 66.29,44.2 8D.A | 71.37,44.2 71.25,44.32 66.42,44.32 66.29,44.2 | 71.37,44.2 8E.A | 8F.A 76.33,44.32 71.5,44.32 71.37,44.2
S9
  Top 0.381: H1.3 33.15,39.24 33.15,2.03 33.78,1.4 49.4,1.4 49.4,2.41 09.K 19.K 29.K 39.K 49.K 59.K 69.K 79.K 89.K 99.K A9.K B9.K C9.K D9.K E9.K F9.K
  Bottom 0.381: 90.A 2.41,49.4 5.21,49.4 5.33,49.28 | 91.A 5.33,49.28 | 10.41,49.28 10.29,49.4 5.46,49.4 5.33,49.28 | 10.41,49.28 92.A | 15.49,49.28 15.37,49.4 10.54,49.4 10.41,49.28 | 15.49,49.28 93.A | 20.57,49.28 20.45,49.4 15.62,49.4 15.49,49.28 | 20.57,49.28 94.A | 20.57,49.28 20.7,49.4 25.53,49.4 95.A 27.81,47.12 29.72,47.12 29.84,47.24 30.73,47.24 96.A 32.89,49.4 35.69,49.4 97.A 37.97,47.12 40.77,47.12 98.A 43.05,47.12 48.39,47.12 99.K 9A.A 53.21,49.4 56.01,49.4 56.13,49.28 | 56.13,49.28 9B.A | 61.21,49.28 61.09,49.4 56.26,49.4 56.13,49.28 | 61.21,49.28 9C.A | 66.29,49.28 66.17,49.4 61.34,49.4 61.21,49.28 | 66.29,49.28 9D.A | 71.37,49.28 71.25,49.4 66.42,49.4 66.29,49.28 | 71.37,49.28 9E.A | 9F.A 76.33,49.4 71.5,49.4 71.37,49.28
S10  (via drill 0.61)
  Top 0.381: 0A.K 1A.K 2A.K 3A.K 4A.K 5A.K 6A.K 54.61,35.18 | 54.61,35.18 7A.K 8A.K 9A.K AA.K | H1.5 35.69,39.24 v35.69,35.94 | v54.48,35.18 54.61,35.18 | AB.A AA.K | AA.K BA.K CA.K DA.K EA.K FA.K
  Bottom 0.381: v35.69,35.94 36.7,34.92 54.23,34.92 v54.48,35.18 | A0.A 2.41,54.48 5.21,54.48 5.33,54.36 | A1.A 5.33,54.36 | 10.41,54.36 10.29,54.48 5.46,54.48 5.33,54.36 | 10.41,54.36 A2.A | 15.49,54.36 15.37,54.48 10.54,54.48 10.41,54.36 | 15.49,54.36 A3.A | 20.57,54.36 20.45,54.48 15.62,54.48 15.49,54.36 | 20.57,54.36 A4.A | 25.65,54.36 25.53,54.48 20.7,54.48 20.57,54.36 | 25.65,54.36 A5.A | 30.73,54.36 30.61,54.48 25.78,54.48 25.65,54.36 | 30.73,54.36 A6.A | 35.81,54.36 35.69,54.48 30.86,54.48 30.73,54.36 | 35.81,54.36 A7.A | 40.89,54.36 40.77,54.48 35.94,54.48 35.81,54.36 | 40.89,54.36 A8.A | 40.89,54.36 41.02,54.48 45.85,54.48 A9.A 48.13,54.48 53.47,54.48 AA.K | 61.21,54.36 61.09,54.48 58.29,54.48 AB.A | 61.21,54.36 AC.A | 66.29,54.36 66.17,54.48 61.34,54.48 61.21,54.36 | 66.29,54.36 AD.A | 71.37,54.36 71.25,54.48 66.42,54.48 66.29,54.36 | 71.37,54.36 AE.A | AF.A 76.33,54.48 71.5,54.48 71.37,54.36
S11  (via drill 0.61)
  Top 0.381: 0B.K 1B.K 2B.K 3B.K 58.29,17.78 58.29,19.3 58.04,19.56 58.04,21.46 59.56,22.99 4B.K 5B.K 6B.K 7B.K 58.29,38.1 58.29,39.62 58.04,39.88 58.04,41.78 59.56,43.31 8B.K 9B.K AB.K BB.K | H1.7 38.23,39.24 v38.23,25.78 | CB.K DB.K EB.K FB.K
  Bottom 0.381: v38.23,25.78 57.53,25.78 5B.K | B0.A 2.41,57.28 5.21,57.28 5.33,57.4 | B1.A 5.33,57.4 | 10.41,57.4 10.29,57.28 5.46,57.28 5.33,57.4 | 10.41,57.4 B2.A | 15.49,57.4 15.37,57.28 10.54,57.28 10.41,57.4 | 15.49,57.4 B3.A | 20.57,57.4 20.45,57.28 15.62,57.28 15.49,57.4 | 20.57,57.4 B4.A | 25.65,57.4 25.53,57.28 20.7,57.28 20.57,57.4 | 25.65,57.4 B5.A | 30.73,57.4 30.61,57.28 25.78,57.28 25.65,57.4 | 30.73,57.4 B6.A | 35.81,57.4 35.69,57.28 30.86,57.28 30.73,57.4 | 35.81,57.4 B7.A | 40.89,57.4 40.77,57.28 35.94,57.28 35.81,57.4 | 40.89,57.4 B8.A | 45.97,57.4 45.85,57.28 41.02,57.28 40.89,57.4 | 45.97,57.4 B9.A | 45.97,57.4 46.1,57.28 50.93,57.28 BA.A 53.21,59.56 58.04,59.56 | 66.29,57.4 66.17,57.28 63.37,57.28 BC.A 61.85,58.04 60.07,58.04 BB.K 59.44,58.42 58.67,59.18 58.04,59.18 58.04,59.56 | 66.29,57.4 BD.A | 71.37,57.4 71.25,57.28 66.42,57.28 66.29,57.4 | 71.37,57.4 BE.A | BF.A 76.33,57.28 71.5,57.28 71.37,57.4 | CB.K 59.44,63.5 58.04,62.1 58.04,59.56
S12  (via drill 0.61)
  Top 0.381: CD.A CC.K | CC.K DC.K EC.K FC.K | 0C.K 1C.K 2C.K 3C.K 4C.K 5C.K 6C.K 7C.K 8C.K 9C.K AC.K BC.K 64.9,58.55 64.9,63.37 CC.K | H1.9 40.77,39.24 v40.77,32.13
  Bottom 0.381: C0.A 2.41,64.64 5.21,64.64 5.33,64.52 | C1.A 5.33,64.52 | 10.41,64.52 10.29,64.64 5.46,64.64 5.33,64.52 | 10.41,64.52 C2.A | 15.49,64.52 15.37,64.64 10.54,64.64 10.41,64.52 | 15.49,64.52 C3.A | 20.57,64.52 20.45,64.64 15.62,64.64 15.49,64.52 | 20.57,64.52 C4.A | 25.65,64.52 25.53,64.64 20.7,64.64 20.57,64.52 | 25.65,64.52 C5.A | 30.73,64.52 30.61,64.64 25.78,64.64 25.65,64.52 | 30.73,64.52 C6.A | 35.81,64.52 35.69,64.64 30.86,64.64 30.73,64.52 | 35.81,64.52 C7.A | 40.89,64.52 40.77,64.64 35.94,64.64 35.81,64.52 | 40.89,64.52 C8.A | 45.97,64.52 45.85,64.64 41.02,64.64 40.89,64.52 | 45.97,64.52 C9.A | 51.05,64.52 50.93,64.64 46.1,64.64 45.97,64.52 | 51.05,64.52 CA.A | 51.05,64.52 51.18,64.64 56.01,64.64 CB.A 58.29,64.64 63.63,64.64 CC.K | 71.37,64.52 71.25,64.64 68.45,64.64 CD.A | 71.37,64.52 CE.A | CF.A 76.33,64.64 71.5,64.64 71.37,64.52 | v40.77,32.13 41.02,31.88 63.63,31.88 6C.K
S13  (via drill 0.61)
  Top 0.381: DE.A DD.K | DD.K ED.K FD.K | 0D.K 1D.K 2D.K 3D.K 4D.K 5D.K 6D.K 7D.K 8D.K 9D.K AD.K BD.K CD.K 69.98,63.63 69.98,68.45 DD.K | H1.11 43.31,39.24 v43.31,30.86
  Bottom 0.381: D0.A 2.41,69.72 5.21,69.72 5.33,69.6 | D1.A 5.33,69.6 | 10.41,69.6 10.29,69.72 5.46,69.72 5.33,69.6 | 10.41,69.6 D2.A | 15.49,69.6 15.37,69.72 10.54,69.72 10.41,69.6 | 15.49,69.6 D3.A | 20.57,69.6 20.45,69.72 15.62,69.72 15.49,69.6 | 20.57,69.6 D4.A | 25.65,69.6 25.53,69.72 20.7,69.72 20.57,69.6 | 25.65,69.6 D5.A | 30.73,69.6 30.61,69.72 25.78,69.72 25.65,69.6 | 30.73,69.6 D6.A | 35.81,69.6 35.69,69.72 30.86,69.72 30.73,69.6 | 35.81,69.6 D7.A | 40.89,69.6 40.77,69.72 35.94,69.72 35.81,69.6 | 40.89,69.6 D8.A | 45.97,69.6 45.85,69.72 41.02,69.72 40.89,69.6 | 45.97,69.6 D9.A | 51.05,69.6 50.93,69.72 46.1,69.72 45.97,69.6 | 51.05,69.6 DA.A | 56.13,69.6 56.01,69.72 51.18,69.72 51.05,69.6 | 56.13,69.6 DB.A | 56.13,69.6 56.26,69.72 61.09,69.72 DC.A 63.37,69.72 68.71,69.72 DD.K | DF.A 76.33,69.72 73.53,69.72 DE.A | v43.31,30.86 43.69,31.24 68.07,31.24 6D.K
S14  (via drill 0.61)
  Top 0.381: 1E.K 2E.K 3E.K 73.53,17.78 73.53,19.3 73.28,19.56 73.28,21.46 74.8,22.99 4E.K 5E.K 6E.K 7E.K 74.8,37.97 73.28,39.5 73.28,41.4 73.53,41.66 73.53,43.18 8E.K 9E.K AE.K BE.K 73.53,58.42 73.53,59.94 73.28,60.2 73.28,62.1 74.8,63.63 CE.K DE.K EE.K 74.68,73.66 73.28,75.06 73.28,76.96 73.53,77.22 73.53,78.74 FE.K | H1.13 45.85,39.24 45.85,32.51 v48.39,29.97
  Bottom 0.381: 0E.K 74.68,2.54 73.28,3.94 73.28,6.86 73.91,6.86 74.68,7.62 1E.K | v48.39,29.97 48.77,30.35 72.26,30.35 6E.K | EF.A 77.09,73.28 75.31,73.28 EE.K 73.79,72.52 66.42,72.52 66.29,72.64 | E0.A 2.41,72.52 5.21,72.52 5.33,72.64 | E1.A 5.33,72.64 | 10.41,72.64 10.29,72.52 5.46,72.52 5.33,72.64 | 10.41,72.64 E2.A | 15.49,72.64 15.37,72.52 10.54,72.52 10.41,72.64 | 15.49,72.64 E3.A | 20.57,72.64 20.45,72.52 15.62,72.52 15.49,72.64 | 20.57,72.64 E4.A | 25.65,72.64 25.53,72.52 20.7,72.52 20.57,72.64 | 25.65,72.64 E5.A | 30.73,72.64 30.61,72.52 25.78,72.52 25.65,72.64 | 30.73,72.64 E6.A | 35.81,72.64 35.69,72.52 30.86,72.52 30.73,72.64 | 35.81,72.64 E7.A | 40.89,72.64 40.77,72.52 35.94,72.52 35.81,72.64 | 40.89,72.64 E8.A | 45.97,72.64 45.85,72.52 41.02,72.52 40.89,72.64 | 45.97,72.64 E9.A | 51.05,72.64 50.93,72.52 46.1,72.52 45.97,72.64 | 51.05,72.64 EA.A | 56.13,72.64 56.01,72.52 51.18,72.52 51.05,72.64 | 56.13,72.64 EB.A | 61.21,72.64 61.09,72.52 56.26,72.52 56.13,72.64 | 61.21,72.64 EC.A | 66.29,72.64 66.17,72.52 61.34,72.52 61.21,72.64 | 66.29,72.64 ED.A
S15  (via drill 0.61)
  Top 0.381: 0F.K 1F.K 2F.K 3F.K 4F.K 5F.K 6F.K 7F.K 8F.K 9F.K AF.K BF.K CF.K DF.K EF.K FF.K 79.88,78.87 79.88,79.88 73.53,79.88 FE.A | H1.15 48.39,39.24 v48.39,35.94
  Bottom 0.381: F0.A 2.41,79.88 5.21,79.88 5.33,79.76 | F1.A 5.33,79.76 | 10.41,79.76 10.29,79.88 5.46,79.88 5.33,79.76 | 10.41,79.76 F2.A | 15.49,79.76 15.37,79.88 10.54,79.88 10.41,79.76 | 15.49,79.76 F3.A | 20.57,79.76 20.45,79.88 15.62,79.88 15.49,79.76 | 20.57,79.76 F4.A | 25.65,79.76 25.53,79.88 20.7,79.88 20.57,79.76 | 25.65,79.76 F5.A | 30.73,79.76 30.61,79.88 25.78,79.88 25.65,79.76 | 30.73,79.76 F6.A | 35.81,79.76 35.69,79.88 30.86,79.88 30.73,79.76 | 35.81,79.76 F7.A | 40.89,79.76 40.77,79.88 35.94,79.88 35.81,79.76 | 40.89,79.76 F8.A | 45.97,79.76 45.85,79.88 41.02,79.88 40.89,79.76 | 45.97,79.76 F9.A | 51.05,79.76 50.93,79.88 46.1,79.88 45.97,79.76 | 51.05,79.76 FA.A | 56.13,79.76 56.01,79.88 51.18,79.88 51.05,79.76 | 56.13,79.76 FB.A | 61.21,79.76 61.09,79.88 56.26,79.88 56.13,79.76 | 61.21,79.76 FC.A | 66.29,79.76 66.17,79.88 61.34,79.88 61.21,79.76 | 66.29,79.76 FD.A | FE.A 71.25,79.88 66.42,79.88 66.29,79.76 | v48.39,35.94 48.77,36.32 78.23,36.32 7F.K